# EAGLE board BPv4-LCDv2a (EAGLE 5.07)
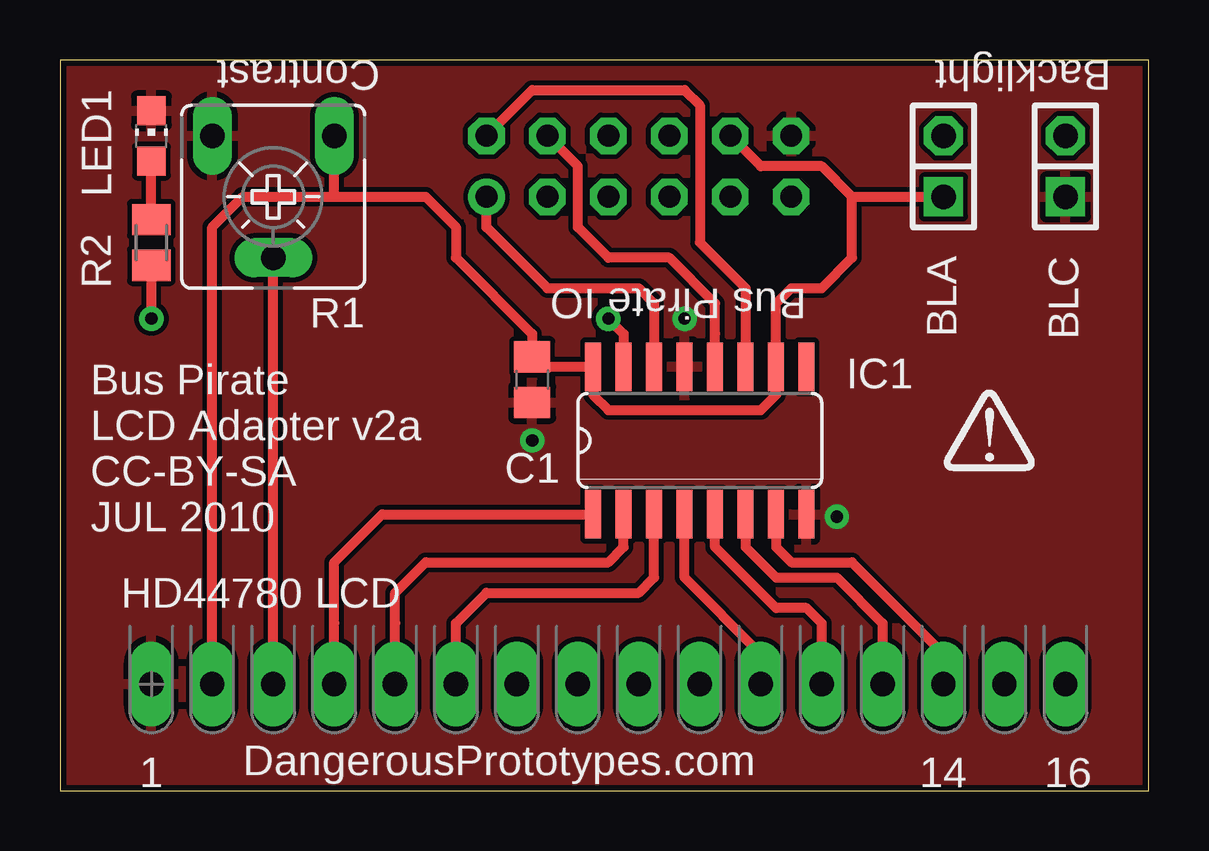
[diagram p0: board, top side]
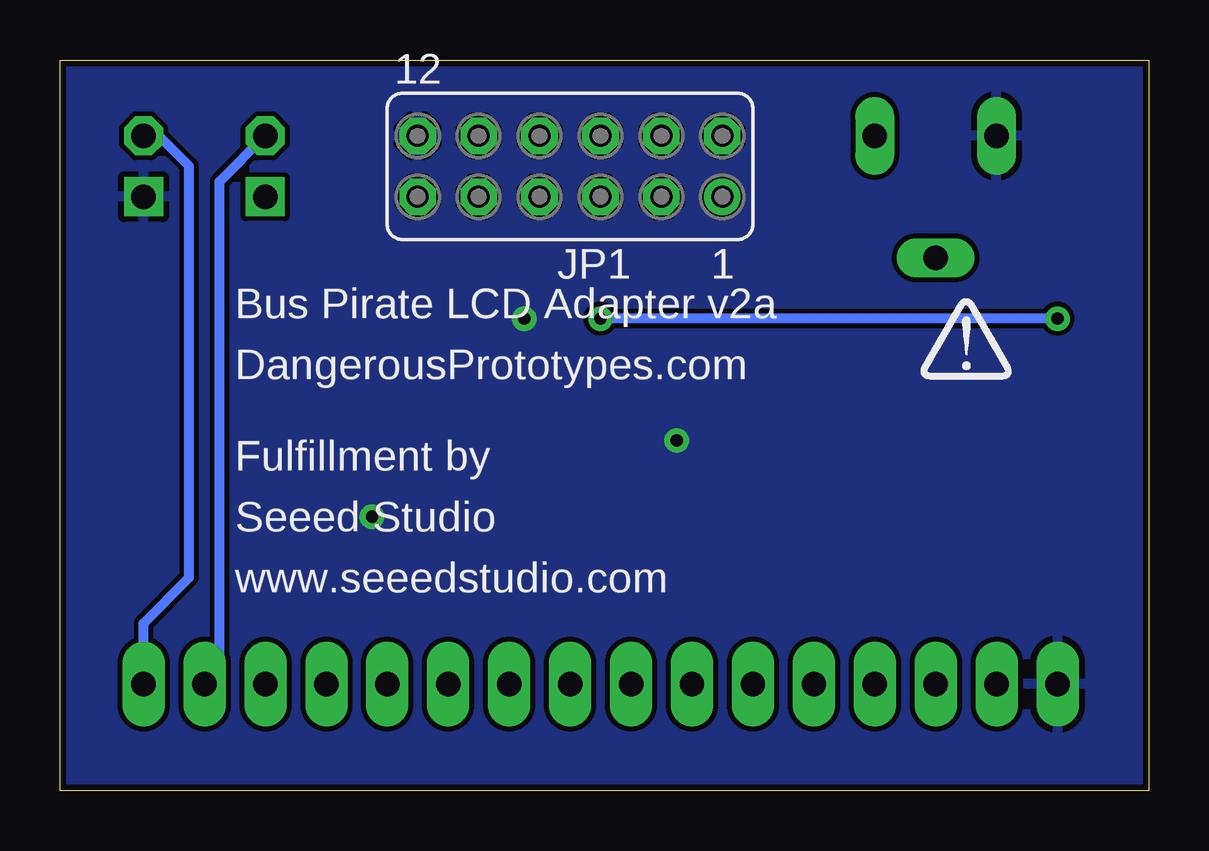
[diagram p1: board, bottom side, seen from below]

Size 45.39 x 30.47 mm. Coordinates in mm from the lower left corner, seen from the top.
Outline: 0,0 45.39,0 45.39,30.47 0,30.47 0,0
Copper layers (1*16): Top 0.035mm / dielectric 1.5mm / Bottom 0.035mm
Design rules "SparkFun": minimum track width 8mil, minimum drill 20mil, track to track 8mil, track to pad 8mil, pad to pad 8mil, via to via 8mil, smd to smd 8mil, copper to edge 10mil, drill to drill 8mil, minimum pad ring 12mil, minimum via ring 10mil, stop-mask expansion 4mil, vias tented up to drill 25mil, thermal gap 10mil

## Footprints (pad centres in the part's own frame; a part is rotated, then mirrored left to right if it is on the bottom)
1X02 = drill 1.016 square: 1 -1.27,0 | drill 1.016 octagon: 2 1.27,0
C0805 = smd 1.3 x 1.5: 1 -0.95,0; 2 0.95,0
SO16 = smd 0.66 x 2.032: 1 -4.445,-3.073; 2 -3.175,-3.073; 3 -1.905,-3.073; 4 -0.635,-3.073; 5 0.635,-3.073; 6 1.905,-3.073; 7 3.175,-3.073; 8 4.445,-3.073; 9 4.445,3.073; 10 3.175,3.073; 11 1.905,3.073; 12 0.635,3.073; 13 -0.635,3.073; 14 -1.905,3.073; 15 -3.175,3.073; 16 -4.445,3.073
FE06-2 = drill 0.914 round: 1 -6.35,1.27 | drill 0.914 octagon: 2 -6.35,-1.27; 3 -3.81,1.27; 4 -3.81,-1.27; 5 -1.27,1.27; 6 -1.27,-1.27; 7 1.27,1.27; 8 1.27,-1.27; 9 3.81,1.27; 10 3.81,-1.27; 11 6.35,1.27; 12 6.35,-1.27
HD44780 = drill 1.016 pad 1.778 long: 1 -20.325,0.007; 2 -17.785,0.007; 3 -15.245,0.007; 4 -12.705,0.007; 5 -10.165,0.007; 6 -7.625,0.007; 7 -5.085,0.007; 8 -2.545,0.007; 9 -0.005,0.007; 10 2.535,0.007; 11 5.075,0.007; 12 7.615,0.007; 13 10.155,0.007; 14 12.695,0.007; 15 15.235,0.007; 16 17.775,0.007
CHIP-LED0805 = smd 1.2 x 1.2: A 0,-1.05; C 0,1.05
CA6V = drill 1.016 long: A -2.54,-2.54; E 2.54,-2.54; S 0,2.54
M0805 = smd 1.3 x 1.6: 1 -0.95,0; 2 0.95,0

## Placement (x,y rotation side)
BLA  [1X02]  36.83,26.04 90 top
BLC  [1X02]  41.91,26.04 90 top
C1  0.1uF  [C0805]  19.69,17.14 270 top
IC1  74HC595D  [SO16]  26.67,14.61 0 top
JP1  [FE06-2]  24.13,26.04 180 bottom
LCD1  HD44780-LCD  [HD44780]  24.13,4.45 0 top
LED1  [CHIP-LED0805]  3.81,27.31 0 top
R1  10K  [CA6V]  8.89,24.77 180 top
R2  1K  [M0805]  3.81,22.86 270 top
U$1  [DP_LOGO]  38.73,13.97 0 top
U$2  [DP_LOGO]  7.62,17.78 0 bottom

## Library data of the parts
BLA BLC = pinhead-2
C1 R2 = rcl
IC1 = 74xx-eu
JP1 = con-lsta
LCD1 = lcd-hd44780
LED1 = led
R1 = pot
U$1 U$2 = dp_devices

## Nets
CLK: IC1.11 JP1.2
CS: IC1.12 JP1.4
D04: IC1.4 LCD1.11
D05: IC1.5 LCD1.12
D06: IC1.6 LCD1.13
D07: IC1.7 LCD1.14
EN: IC1.3 LCD1.6
GND: BLC.1 C1.2 IC1.8 IC1.13 JP1.12 LCD1.1 LED1.C R1.E
MISO: JP1.3
MOSI: IC1.14 JP1.1
N$1: IC1.15 R2.2
N$2: LED1.A R2.1
N$3: BLA.2 LCD1.15
N$4: BLC.2 LCD1.16
N$10: LCD1.3 R1.S
RS: IC1.1 LCD1.4
RW: IC1.2 LCD1.5
VCC: BLA.1 C1.1 IC1.10 IC1.16 JP1.10 LCD1.2 R1.A
VPPEN: JP1.5
VTARGET: JP1.9

## Tracks (layer width: path | path; a pad name or v marks a point on that pad's centre or on a via)
CLK
  Top 0.406: IC1.11 28.57,20.96 26.67,22.86 26.67,28.57 26.03,29.21 19.69,29.21 JP1.2
CS
  Top 0.406: 27.3,19.05 IC1.12 27.3,20.32 25.4,22.22 22.86,22.22 21.59,23.5 21.59,26.04 JP1.4
D04
  Top 0.406: IC1.4 26.03,8.89 29.2,5.72 LCD1.11
D05
  Top 0.406: LCD1.12 31.74,5.08 | 31.74,5.08 31.74,5.72 | IC1.5 27.3,10.16 29.84,7.62 31.12,7.62 31.75,6.99 31.75,5.08 31.74,5.08
D06
  Top 0.406: LCD1.13 34.29,6.99 32.38,8.89 29.84,8.89 28.57,10.16 IC1.6
D07
  Top 0.406: IC1.7 29.84,10.16 30.48,9.53 33.02,9.53 36.83,5.71 LCD1.14
EN
  Top 0.406: IC1.3 24.77,8.89 24.13,8.25 17.78,8.25 16.51,6.99 LCD1.6
GND  (via drill 0.51)
  other vias: 26.03,19.68 32.38,11.43 19.69,14.61
  pour Bottom: 0,30.48 45.72,30.48 45.72,0 0,0
  pour Top: 0,30.48 45.72,30.48 45.72,0 0,0
MOSI
  Top 0.406: IC1.14 24.77,20.32 24.13,20.96 20.32,20.96 17.78,23.5 JP1.1
N$1  (via drill 0.51)
  Top 0.406: R2.2 v3.81,19.68 | v22.86,19.68 23.49,19.05 IC1.15
  Bottom 0.406: v3.81,19.68 v22.86,19.68
N$2
  Top 0.406: R2.1 LED1.A
N$3
  Bottom 0.406: BLA.2 38.73,25.4 38.73,5.08 LCD1.15
N$4
  Bottom 0.406: BLC.2 41.27,27.31 40,26.04 40,8.89 41.91,6.99 LCD1.16
N$10
  Top 0.406: R1.S 9.53,22.22 8.89,21.59 LCD1.3
RS
  Top 0.406: IC1.1 13.44,11.53 11.43,9.53 11.43,7 LCD1.4
RW
  Top 0.406: IC1.2 23.49,10.16 22.86,9.53 15.24,9.53 13.97,8.25 13.97,7 LCD1.5
VCC
  Top 0.406: C1.1 20.1,17.68 IC1.16 22.23,16.51 22.86,15.88 29.21,15.88 29.84,16.51 IC1.10 29.84,20.32 30.48,20.96 31.75,20.96 33.02,22.22 33.02,24.77 | 11.43,24.77 R1.A | 11.43,24.77 7.62,24.77 6.35,23.5 LCD1.2 | C1.1 19.37,18.42 | 11.43,24.77 15.24,24.77 16.51,23.5 16.51,22.22 19.69,19.05 C1.1 | 33.02,24.77 31.75,26.04 29.21,26.04 JP1.10 | 33.02,24.77 BLA.1

## Text on the board
tNames: Contrast | Backlight | Bus Pirate IO | Bus Pirate | LCD Adapter v2a | CC-BY-SA | JUL 2010 | HD44780 LCD | DangerousPrototypes.com
bNames: Bus Pirate LCD Adapter v2a | DangerousPrototypes.com | Fulfillment by | Seeed Studio | www.seeedstudio.com